# Altium PCB Extandboard.PcbDoc
Units mil, origin at the board's own origin, x right, y up, seen from the top; angles counter-clockwise.
Board outline 1040 x 1156.09 mil, 2 copper layers (Top Layer, Bottom Layer); 4 components, 10 nets, 27 pads, 0 vias.
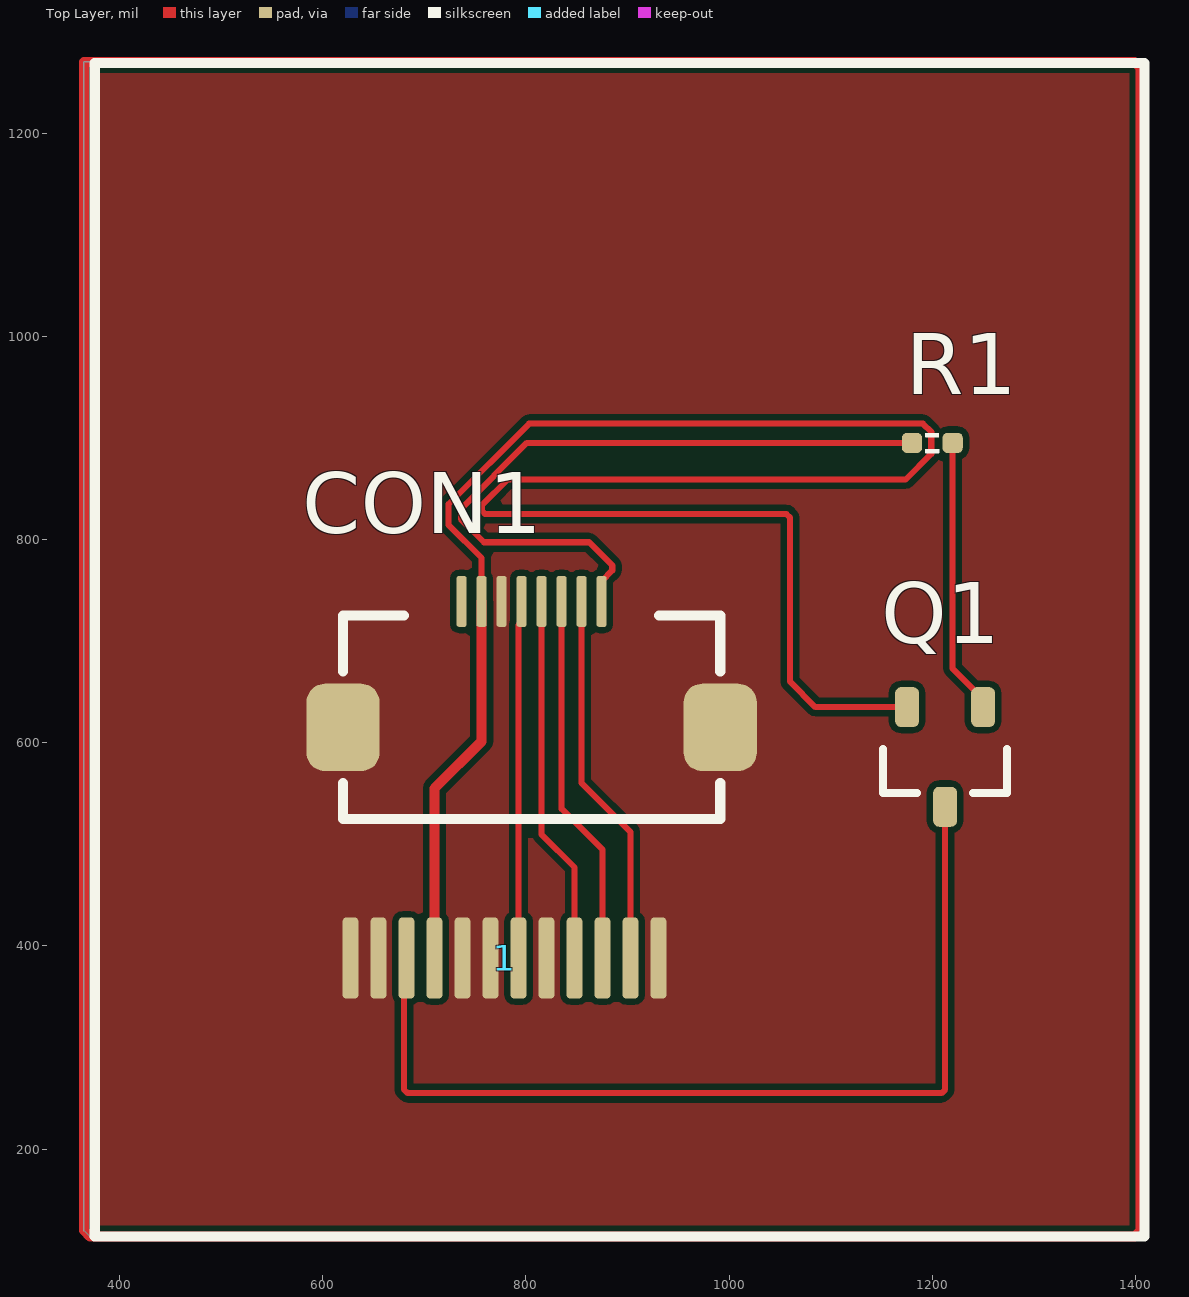
[diagram p0: Top Layer view]
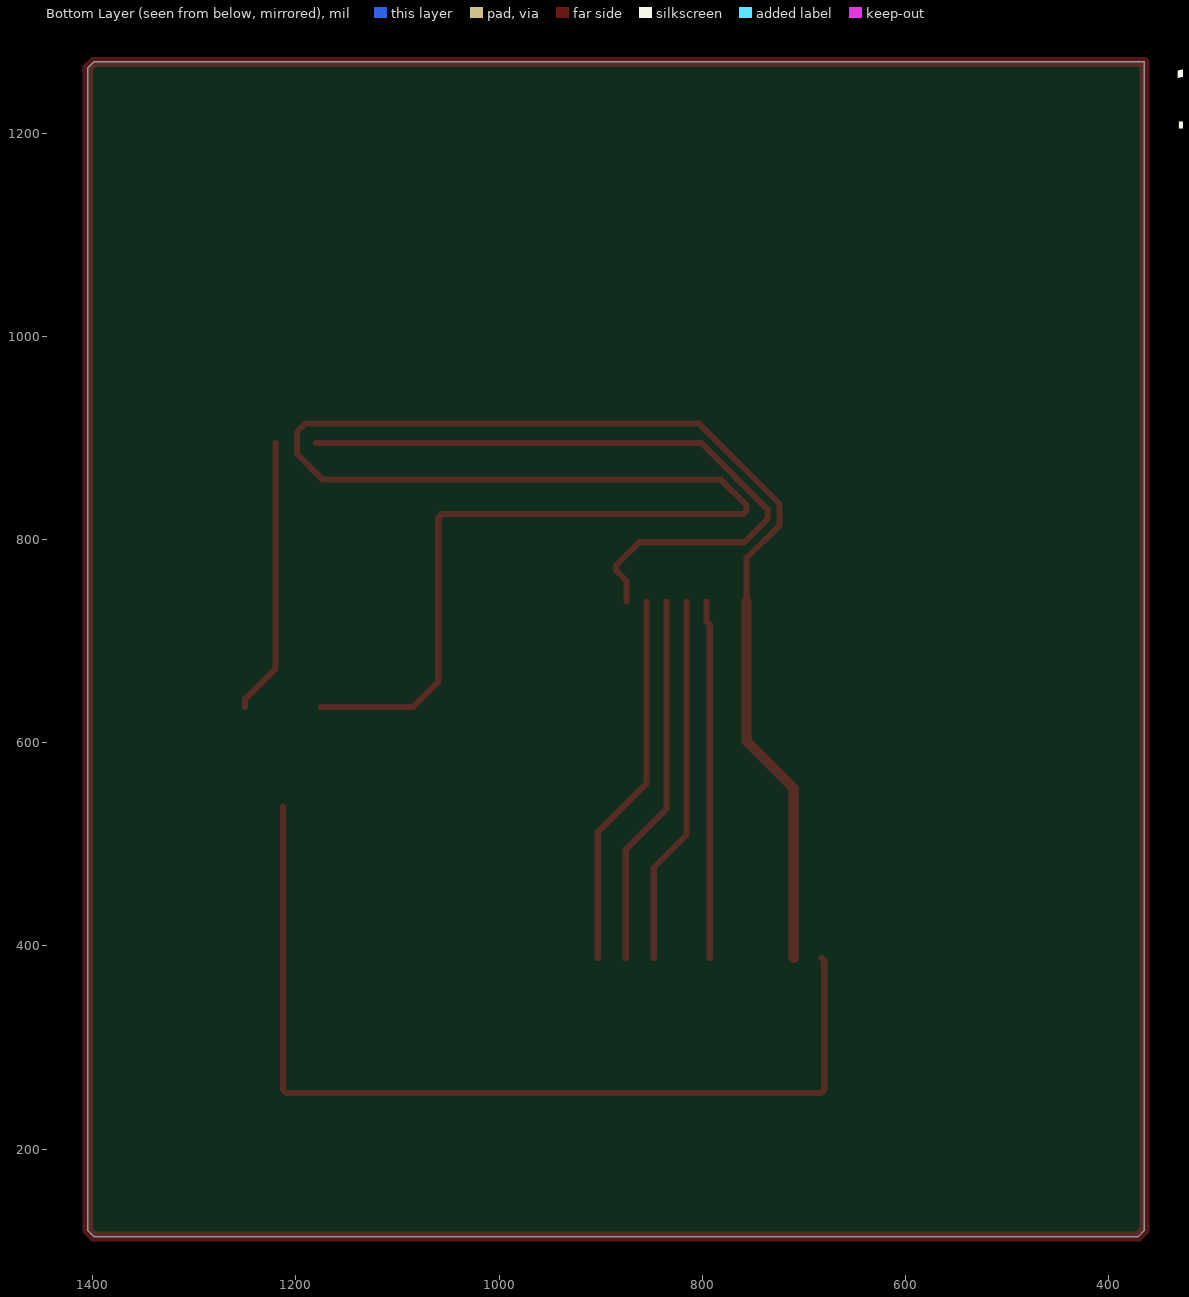
[diagram p1: Bottom Layer view, seen from below]
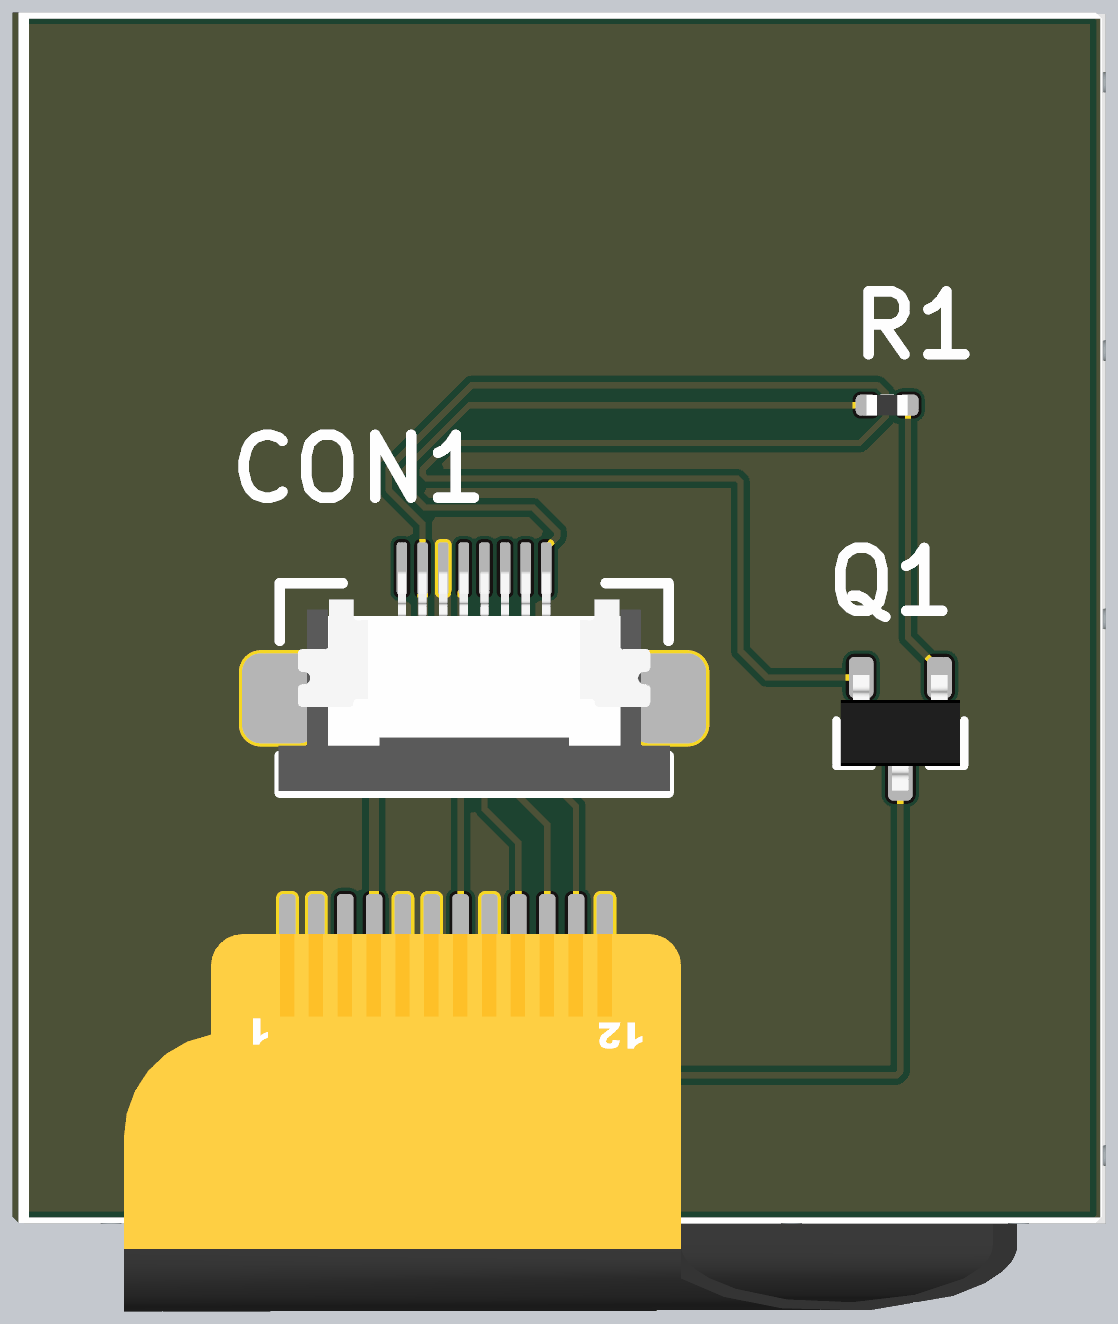
[diagram p2: 3D render of the assembled board from above, using the file's embedded part models]

## Layer stack, top to bottom
Top Solder: solder mask 0.4, Solder Resist, Dk 3.5
Top Layer: signal copper 1.4
Dielectric 1: dielectric 12.6, FR-4, Dk 4.8
Bottom Layer: signal copper 1.4
Bottom Solder: solder mask 0.4, Solder Resist, Dk 3.5

## Board outline
365,119.77 370.86,113.91 1399.14,113.91 1405,119.77 1405,1264.14 1399.14,1270 365,1270

## Design rules (kind name [scope] priority, off if disabled: settings)
Clearance [All] p1: gap=6 ignorepadtopadclearanceinfootprint=FALSE
MinimumSolderMaskSliver [All] p1: minsoldermaskwidth=1
PlaneClearance [All] p1: clearance=8
PlaneConnect [All] p1: planeconnectstyle=Direct reliefexpansion=20 reliefentries=4 reliefconductorwidth=10 reliefairgap=10
PolygonConnect [All] p1: connectstyle=Direct reliefconductorwidth=10 reliefentries=4 polygonreliefangle="90 Angle" airgapwidth=10
RoutingVias [All] p1: holewidth=28 width=50 viastyle="Through Hole" minholewidth=28 minwidth=50 maxholewidth=28 maxwidth=50
SilkToSolderMaskClearance [IsPad] p1: minsilkscreentomaskgap=1 clearancetoexposedcopper=TRUE
SolderMaskExpansion [All] p1: expansion=3 istentingtop=FALSE
Width [All] p1: maxlimit=10 minlimit=6 preferedwidth=6
26 further rules are at their usual default settings.

## Components (designator, comment, footprint, x,y, rotation, side; value= is the part's Value field where it differs from the comment)
1 "LCD-240x240" LCD-240x240-NoHole 909.39,595 r180 bottom
CON1 "FFC_0.5_8" FFC_0.5_8 805.63,650 r0 top
Q1 "AO3415A" SOT23-3 1212.6,585.94 r270 top
R1 "1K" RES_0402 1200,895 r0 top value=22R

## Footprints (in the part's own frame and the unit in brackets; to place one, negate y for a bottom-side part, rotate by r counter-clockwise, add the part's x,y. Pads: shape width x height; smd on the part's side, far side on the other; paste and mask are expansions set on the pad)
FFC_0.5_8 [mil]
  rrect50% 72x86 smd: 0(-185.63,-35) 0(185.63,-35)
  rrect50% 10x50 smd: 1(-68.9,89) 2(-49.21,89) 3(-29.53,89) 4(-9.84,89) 5(9.84,89) 6(29.53,89) 7(49.21,89) 8(68.9,89)
  silkscreen extent -186,-125 186,75, body extent -187,-124 187,87, height 82
LCD-240x240-NoHole [mil]
  rrect50% 15.75x80 smd far side: 1(282,-207) 2(254.44,-207) 3(226.88,-207) 4(199.32,-207) 5(171.76,-207) 6(144.2,-207) 7(116.65,-207) 8(89.09,-207) 9(61.53,-207) 10(33.97,-207) 11(6.41,-207) 12(-21.15,-207)
  body extent -499,-565 534,673, height 20
RES_0402 [mil]
  rrect50% 20x20 smd: 1(-20,0) 2(20,0)
  silkscreen extent -6,-10 6,10, body extent -20,-10 20,10, height 14
SOT23-3 [mm] "SOT23, 3-Leads, Body 3.1x3.0mm (max), Pitch 0.95mm, IPC Medium Density"
  rrect50% 1x0.6 smd: 1(-1.246,0.95) 2(-1.246,-0.95) 3(1.246,0)
  silkscreen extent -0.2,-1.55 0.9,1.55, body extent -1.3,-1.45 1.5,1.45, height 1.2

## Part data
1: "显示屏"
CON1: "FFC", System=Connector
Q1: "MOSFET", LatestRevisionDate=17-Jul-2002, LatestRevisionNote="Re-released for DXP Platform.", PackageDescription="TO, Flat Index; 3 In-Line, Axial Leads; Body Dia. 4.6mm; Lead Dia. 0.5 mm (max)", PackageReference=E3, PackageVersion=1995/1996, Published=8-Jun-2000, Publisher="Altium Limited"
R1: library part 电阻-0402, "Resistor"

## Nets (pads, with @x,y where several pads share a name; then routed paths per layer and width w, separated by ;. In a path a pad name is that pad's centre, name@x,y a point inside that pad or via, vN(x,y) a via of type N, cw(c..) or ccw(c..) an arc to the next point about the centre after c; other vN are vias at no path point)
3V3: 1.4 CON1.2 Q1.2 | length 2074.2
  Top Layer w6: 1.4@710,388.07 1.4 ; CON1.2 756.42,781.75 724,814.16 724,834.91 803.09,914 1190.8,914 1199,905.8 1199,884.2 1173.64,858.84 781.87,858.84 756.51,833.49 756.51,828.51 760.03,825 1056.49,825 1060,821.49 1060,660 1085,635 Q1.2
  Top Layer w10: 1.4@710,388.07 710,555 756.42,601.42 CON1.2
DC: 1.7 CON1.4 | length 352.3
  Top Layer w6: 1.7 792.75,715.96 795.79,719 CON1.4
GND: 1.1 1.2 1.5 1.6 1.8 1.12 CON1.0 CON1.3
LCD_BL: CON1.8 R1.1 | length 688.6
  Top Layer w6: CON1.8 874.53,759 885.01,769.49 885.01,774.46 862.24,797.23 758.77,797.23 736,820 736,829.94 801.06,895 R1.1
LCD_BL_VCC: 1.3 Q1.3 | length 944.4
  Top Layer w6: 1.3 680,385.49 680,258.51 683.51,255 1209.08,255 1212.6,258.51 Q1.3
MOSI: 1.10 CON1.6 | length 367.7
  Top Layer w6: CON1.6 835.16,534.84 875.43,494.57 1.10
NetQ1_1: Q1.1 R1.2 | length 272.4
  Top Layer w6: R1.2 1220,672.87 1250,642.87 Q1.1
RES: 1.11 CON1.7 | length 370.9
  Top Layer w6: CON1.7 854.84,560.16 902.98,512.02 1.11
SCK: 1.9 CON1.5 | length 364.4
  Top Layer w6: CON1.5 815.47,509.53 847.87,477.13 1.9
VDD_5V: CON1.1
copper on no net: | length 4381.9
  Top Layer w10: 365,119.77 365,1270 1399.14,1270 1405,1264.14 1405,119.77 1399.14,113.91 370.86,113.91 365,119.77

## Polygon pours and split planes (outlines as drawn)
GND on Top Layer "GND_L01_P000" (solid, remove dead copper, pour order 0): 365,1270 1399.14,1270 1399.14,125.63 1405,119.77 1399.14,113.91 370.86,113.91 370.86,124.14 365,130